# EAGLE board Down Linker ver2.0.0 (EAGLE 9.6.2)
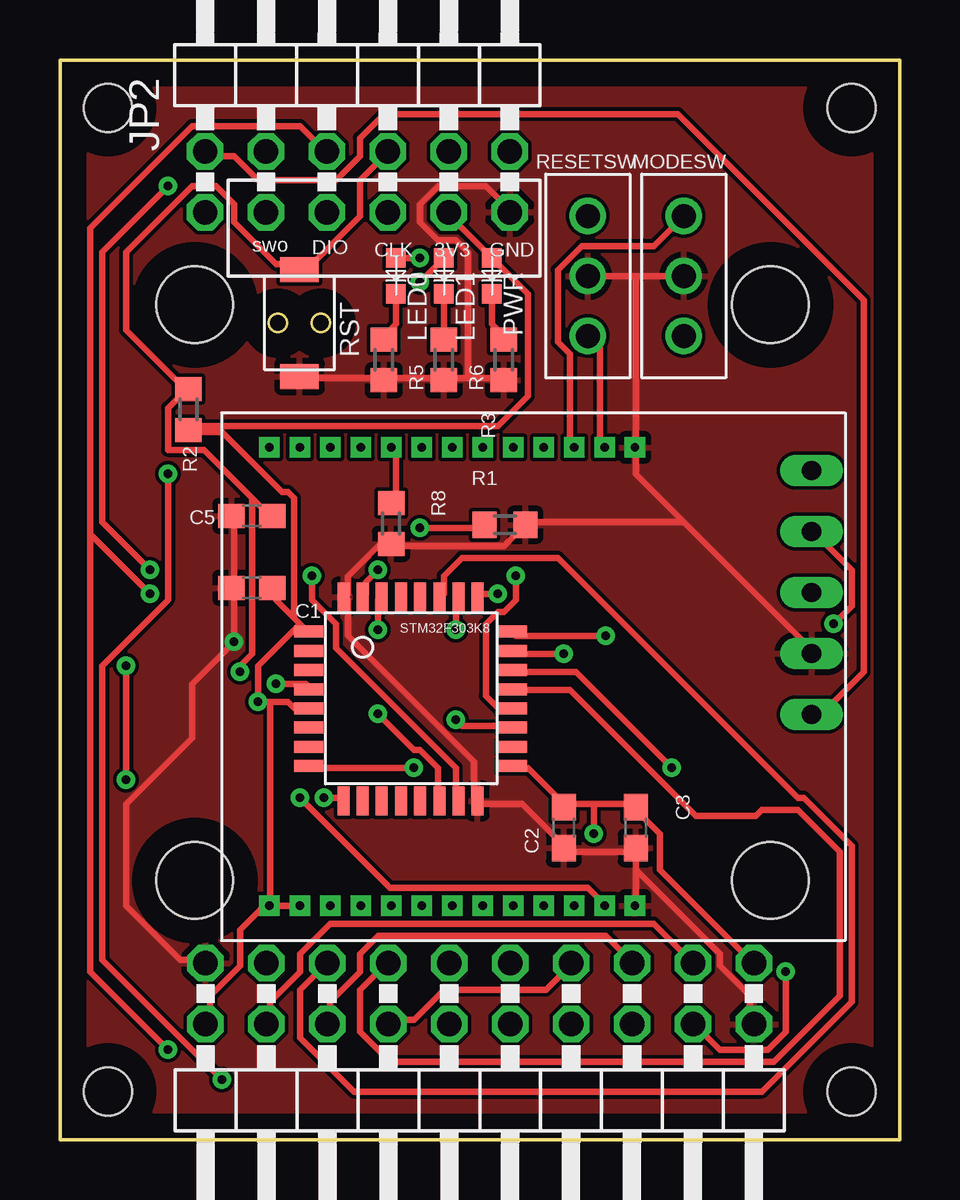
[diagram p0: board, top side]
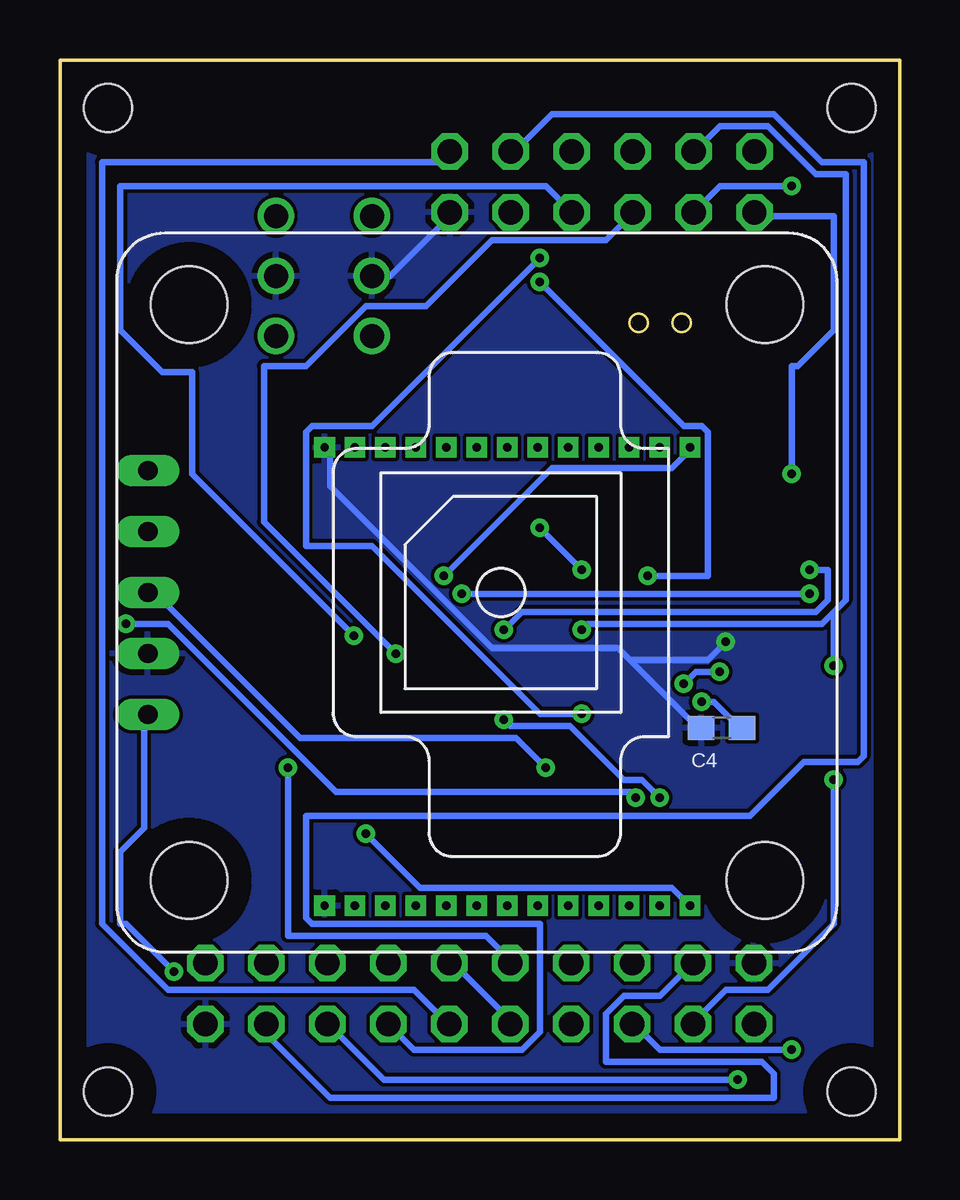
[diagram p1: board, bottom side, seen from below]

Size 35 x 45 mm. Coordinates in mm from the lower left corner, seen from the top.
Outline: 0,0 0,45 35,45 35,0 0,0
Copper layers (1*16): Top 0.035mm / dielectric 1.5mm / Bottom 0.035mm
Design rules "default": minimum track width 6mil, minimum drill 0.35mm, track to track 6mil, track to pad 6mil, pad to pad 6mil, via to via 6mil, smd to smd 6mil, copper to edge 40mil, drill to drill 6mil, minimum pad ring 10mil, minimum via ring 8mil, stop-mask expansion 4mil, vias tented up to drill 0mil, thermal gap 10mil
Net classes: 0 default: width 0.279 mm
Holes 2 mm at 2,43 2,2 33,2 33,43

## Footprints (pad centres in the part's own frame; a part is rotated, then mirrored left to right if it is on the bottom)
C1608 = smd 1.1 x 1: 1 -0.85,0; 2 0.85,0
2X06/90 = drill 1.016 octagon: 1 -6.35,-6.35; 2 -6.35,-3.81; 3 -3.81,-6.35; 4 -3.81,-3.81; 5 -1.27,-6.35; 6 -1.27,-3.81; 7 1.27,-6.35; 8 1.27,-3.81; 9 3.81,-6.35; 10 3.81,-3.81; 11 6.35,-6.35; 12 6.35,-3.81
2X10/90 = drill 1.016 octagon: 1 -11.43,-6.35; 2 -11.43,-3.81; 3 -8.89,-6.35; 4 -8.89,-3.81; 5 -6.35,-6.35; 6 -6.35,-3.81; 7 -3.81,-6.35; 8 -3.81,-3.81; 9 -1.27,-6.35; 10 -1.27,-3.81; 11 1.27,-6.35; 12 1.27,-3.81; 13 3.81,-6.35; 14 3.81,-3.81; 15 6.35,-6.35; 16 6.35,-3.81; 17 8.89,-6.35; 18 8.89,-3.81; 19 11.43,-6.35; 20 11.43,-3.81
OSXX1608C1A = smd 0.8 x 0.8: AN -0.75,0; CT 0.75,0
SRIDE_SWITCH = drill 1: L -2.5,0; LR 0,0; R 2.5,0
R0603 = smd 1 x 1.1: 1 -0.85,0; 2 0.85,0
TVAF06-A020B-R = smd 1.6 x 1.05: P$1 0,2.225; P$2 0,-2.225
STM32F303K8 = smd 0.5 x 1.2: BOOT 1.6,8.5; PA3/UART2_RX 0.8,0; PA4/SPI1_NSS 1.6,0; PA5/SPI1_SCK 2.4,0; PA6/SPI1_MISO 3.2,0; PA7/SPI1_MOSI 4,0; PA15/I2C1_SCL 6.4,8.5; PB0 4.8,0; PB1 5.6,0; PB3/SWO 5.6,8.5; PB4 4.8,8.5; PB5 4,8.5; PB6 3.2,8.5; PB7/I2C1_SDA 2.4,8.5; VSS 0.8,8.5; VSS2 6.4,0 | smd 1.2 x 0.5: NRST -0.65,4.65; PA0 -0.65,3.05; PA1 -0.65,2.25; PA2/UART2_TX -0.65,1.45; PA8 7.85,2.25; PA9/UART1_TX 7.85,3.05; PA10/UART1_RX 7.85,3.85; PA11/CAN_RX 7.85,4.65; PA12/CAN_TX 7.85,5.45; PA13/SWDIO 7.85,6.25; PA14/SWCLK 7.85,7.05; PF0 -0.65,6.25; PF1 -0.65,5.45; VDD -0.65,7.05; VDD2 7.85,1.45; VDDA -0.65,3.85
AE-GYSFDMAXB = drill 0.8 long: P1 13.716,5.08; P2 13.716,2.54; P3 13.716,0; P4 13.716,-2.54; P5 13.716,-5.08 | hole 3.2: -12,12; 12,12; 12,-12; -12,-12
RM-92A = drill 0.35 square: - 0,11.43; BOOT0 0,5.08; GND1 0,15.24; GND2 19.1,15.24; PA8 0,6.35; PA9 0,0; PA10 19.1,13.97; PA11 0,8.89; PA12 0,7.62; PA13 19.1,11.43; PA14 19.1,12.7; PA15 19.1,10.16; PB2 0,3.81; PB3 19.1,8.89; PB4 19.1,7.62; PB7 0,10.16; PB10 0,2.54; PB11 0,1.27; PB12 19.1,2.54; PB13 19.1,3.81; PB14 19.1,5.08; PB15 19.1,6.35; PC13 0,12.7; RESET_N 0,13.97; VCC 19.1,1.27; VDDRF 19.1,0

## Placement (x,y rotation side)
C1  100nF  [C1608]  8,23 180 top
C2  100nF  [C1608]  21,13 270 top
C3  4.7uF  [C1608]  24,13 270 top
C4  10nF  [C1608]  7.41,17.17 180 bottom
C5  0.1uF  [C1608]  8,26 180 top
JP2  [2X06/90]  12.4,45 0 top
JP3  [2X10/90]  17.5,1 180 top
LED0  [OSXX1608C1A]  14,36 270 top
LED1  [OSXX1608C1A]  16,36 270 top
MODESW  SRIDE_SWITCH  [SRIDE_SWITCH]  26,36 90 top
PWR  [OSXX1608C1A]  18,36 270 top
R1  10k  [R0603]  18.56,25.62 0 top
R2  10k or DNF  [R0603]  5.36,30.43 270 top
R3  100  [R0603]  18.5,32.5 90 top
R5  100  [R0603]  13.5,32.5 90 top
R6  100  [R0603]  16,32.5 90 top
R8  10k  [R0603]  13.81,25.68 90 top
RESETSW  SRIDE_SWITCH  [SRIDE_SWITCH]  22,36 270 top
RST  [TVAF06-A020B-R]  9.98,34.03 0 top
U$1  STM32F303K8  [STM32F303K8]  11.02,14.12 0 top
U$2  AE-GYSFDMAXB  [AE-GYSFDMAXB]  17.62,22.8 180 bottom
U$3  RM-92A  [RM-92A]  8.73,28.85 270 top

## Library data of the parts
C1-C5 = rcl; SPICEPREFIX: C
JP2 JP3 = pinhead
LED0 LED1 PWR = Chip LED
MODESW RESETSW = Sride Switch
R1-R3 R5 R6 R8 = rcl; SPICEPREFIX: R
RST = Tact switch
U$1 = STM32F303K8
U$2 = AE-GYSFDMAXB
U$3 = RM-92A

## Nets
+3V3: C1.1 C2.1 C3.1 C4.1 JP2.9 JP3.1 JP3.20 PWR.AN R2.2 U$1.VDD U$1.VDD2 U$1.VDDA U$3.VCC U$3.VDDRF
+5V: JP2.2 JP3.4 JP3.17 U$2.P1
BIT1: JP3.11 U$1.PA12/CAN_TX
BIT2: JP3.13 U$1.PA11/CAN_RX
BOOT0: R1.1 U$1.BOOT
FP_CHECKER: JP3.15 U$1.PB4
FPRAW: JP2.12 JP3.10
GND: C1.2 C2.2 C3.2 C4.2 C5.2 JP2.11 JP3.2 JP3.19 MODESW.LR R1.2 R3.1 R5.1 R6.1 R8.1 RESETSW.LR RST.P$2 U$1.VSS U$1.VSS2 U$2.P2 U$3.GND1 U$3.GND2
GPSRX: U$1.PA2/UART2_TX U$2.P3
GPSTX: U$1.PA3/UART2_RX U$2.P4
LED0: LED0.AN U$1.PB0
LED1: LED1.AN U$1.PB1
LOGRX: JP3.7 JP3.14
LOGTX: JP3.9 JP3.12
N$1: PWR.CT R3.2
N$2: LED0.CT R5.2
N$4: LED1.CT R6.2
N$5: MODESW.R U$3.PC13
N$6: RESETSW.R U$3.RESET_N
N$10: R8.2 U$3.BOOT0
NRST: C5.1 JP2.8 R2.1 RST.P$1 U$1.NRST
OSC_IN: U$1.PF0
OSC_OUT: U$1.PF1
PWM: JP2.1 JP3.6
RFRX: U$1.PA9/UART1_TX U$3.PA10
RFTX: U$1.PA10/UART1_RX U$3.PA9
SCL: JP2.6 JP3.5 JP3.16 U$1.PA15/I2C1_SCL
SDA: JP2.4 JP3.3 JP3.18 U$1.PB7/I2C1_SDA
SW: JP2.10 JP3.8
SWCLK: JP2.7 U$1.PA14/SWCLK
SWDIO: JP2.5 U$1.PA13/SWDIO
SWO: JP2.3 U$1.PB3/SWO

## Tracks (layer width: path | path; a pad name or v marks a point on that pad's centre or on a via)
+3V3  (via drill 0.35)
  Top 0.279: 22.25,14 24,14 C3.1 24,13.75 25,12.75 25,11.25 28.75,7.5 JP3.1 | 22.25,14 21,14 | 21,14 19.5,15.5 19,15.5 U$1.VDD2 | 21,14 C2.1 | U$3.VCC 8.75,9.75 | 8.75,18.25 9.5,18.25 9.75,18 10.25,18 U$1.VDDA | 8.75,18.25 v8.25,18.25 8.25,19.75 10,21.5 | 8.75,18.25 8.75,9.75 | 8.75,9.75 U$3.VDDRF 8.5,9.75 7.5,8.75 7.5,7.25 6.25,6 6.25,5 JP3.20 | JP2.9 16.25,38.5 PWR.AN 19.5,35.25 19.5,31 18.25,29.75 5.5,29.75 R2.2 5.5,29.5 6.75,29.5 9.25,27 9.5,27 9.75,26.75 9.75,21.75 | 10,21.5 10.25,21.25 U$1.VDD | 10,21.5 9.75,21.75 | 9.75,21.75 9,22.5 9,23 C1.1 | v22.25,12.75 22.25,14
  Bottom 0.279: v8.25,18.25 7.75,18.25 6.75,17.25 C4.1 | v22.25,12.75 20,10.5 9.5,10.5 8.75,9.75 U$3.VDDRF
+5V  (via drill 0.35)
  Top 0.279: v30.25,7 30.25,4.5 29.5,3.75 27.5,3.75 26.5,4.75 JP3.4 | JP2.2 6.25,41 7.25,41 8.25,40 11.5,40 12.5,41 12.5,41.75 13.5,42.75 25.75,42.75 33.5,35 33.5,19.5 31.5,17.5 U$2.P1
  Bottom 0.279: v30.25,7 32.25,9 32.5,9 32.5,12 31.5,13 31.5,17.5 U$2.P1 | JP3.17 8.75,7.25 10,6 11.5,6 12.25,5.25 12.25,3.25 5.75,3.25 5.25,2.75 5.25,1.75 23.75,1.75 26.25,4.25 26.25,4.75 JP3.4
BIT1  (via drill 0.35)
  Top 0.279: v25.5,15.5 21.5,19.5 19,19.5 U$1.PA12/CAN_TX
  Bottom 0.279: v25.5,15.5 25.5,8.5 17.25,8.5 16.25,7.5 JP3.11
BIT2
  Top 0.279: U$1.PA11/CAN_RX 19,18.75 21.25,18.75 26.5,13.5 29,13.5 29.25,13.75 30.75,13.75 32.5,12 32.5,6 29.75,3.25 13.75,3.25 12.5,4.5 12.5,6.25 13.5,7.25 JP3.13
BOOT0  (via drill 0.35)
  Top 0.279: v15,25.5 17.5,25.5 R1.1 | v13.25,23.75 12.75,23.25 12.75,22.75 U$1.BOOT
  Bottom 0.279: v13.25,23.75 v15,25.5
FP_CHECKER
  Top 0.279: U$1.PB4 16,22.75 16,23.5 16.75,24.25 20.75,24.25 30.75,14.25 31,14.25 33,12.25 33,5.75 29.25,2 12.25,2 10,4.25 10,6.25 11,7.25 JP3.15
FPRAW
  Bottom 0.279: JP3.10 19,5 20.25,6.25 30.5,6.25 33.25,9 33.25,40.75 19,40.75 18.75,41 JP2.12
GND  (via drill 0.35)
  Top 0.279: 16,31.75 13.5,31.75 | 16,31.75 17,31.75 | 17,31.75 18.5,31.75 R3.1 | 16,31.75 R6.1 | 13.5,31.75 10,31.75 RST.P$2 | 13.5,31.75 R5.1 | MODESW.LR 24,36 | 24,36 RESETSW.LR | 17,31.75 17,37 16.5,37.5 15.75,37.5 15,38.25 15,39 15.75,39.75 17.75,39.75 18.75,38.75 JP2.11 | 24,12 21,12 C2.2 21,12.25 19.25,14 17.5,14 U$1.VSS2 17.25,14.25 17.25,15.75 12,21 12,22.5 U$1.VSS 12,22.75 12,23.5 13.25,24.75 13.75,24.75 R8.1 14,24.75 18.5,24.75 19.25,25.5 R1.2 19.5,25.75 26,25.75 | 24,12 24,11.25 | 24,11.25 24,9.75 U$3.GND2 | 24,12 C3.2 | 24,11.25 27.5,7.75 27.5,7.25 28.75,6 28.75,5 JP3.2 | 7.25,23 7.25,26 C5.2 | 7.25,23 v7.25,20.75 5.5,19 5.5,16.75 2.75,14 2.75,9.75 5,7.5 6,7.5 JP3.19 | 7.25,23 C1.2 | 26,25.75 24,27.75 24,28.75 U$3.GND1 24,29 24,36 | 26,25.75 31.25,20.5 U$2.P2
  Bottom 0.279: RESETSW.LR 21.25,36 18.75,38.5 JP2.11 | 11.25,20 11.75,20.5 17,20.5 23.75,27.25 23.75,28.75 U$3.GND1 | 11.25,20 8.5,17.25 C4.2 | v7.25,20.75 8,20 11.25,20
  pour Top: -3,48 38,48 38,-2 -3,-2
  pour Bottom: -5,49 39,49 39,-3 -5,-3
GPSRX  (via drill 0.35)
  Top 0.279: v14.75,15.5 10.5,15.5 U$1.PA2/UART2_TX
  Bottom 0.279: v14.75,15.5 16,16.75 25,16.75 31,22.75 31.25,22.75 U$2.P3
GPSTX  (via drill 0.35)
  Top 0.279: v11,14.25 11.75,14.25 U$1.PA3/UART2_RX | v32.25,21.5 33,22.25 33,23.75 31.5,25.25 U$2.P4
  Bottom 0.279: v11,14.25 11.25,14.5 23.5,14.5 30.5,21.5 v32.25,21.5
LED0  (via drill 0.35)
  Top 0.279: v15,36.75 LED0.AN | v13.25,17.75 14.75,16.25 15,16.25 15.75,15.5 15.75,14.25 U$1.PB0
  Bottom 0.279: v15,36.75 22,29.75 24.5,29.75 24.75,29.5 24.75,24.75 22,24.75 15,17.75 v13.25,17.75
LED1  (via drill 0.35)
  Top 0.279: v15,35.75 LED1.AN | v10.5,23.5 10.5,22.5 11.5,21.5 11.5,20.5 16.5,15.5 16.5,14.25 U$1.PB1
  Bottom 0.279: v15,35.75 9,29.75 8.25,29.75 8,29.5 8,23.5 v10.5,23.5
LOGRX
  Top 0.279: JP3.14 13.75,5 14.75,5 16,6.25 20.25,6.25 21.25,7.25 JP3.7
LOGTX
  Bottom 0.279: JP3.12 16.25,5 18.5,7.25 18.75,7.25 JP3.9
N$1
  Top 0.279: PWR.CT 18,34 18.5,33.5 R3.2
N$2
  Top 0.279: LED0.CT 14,34 13.5,33.5 R5.2
N$4
  Top 0.279: R6.2 LED1.CT
N$5
  Top 0.279: MODESW.R 24.75,37.25 21.75,37.25 20.75,36.25 20.75,33.25 21.25,32.75 21.25,29 U$3.PC13
N$6
  Top 0.279: RESETSW.R 22.5,33 22.5,29 U$3.RESET_N
N$10
  Top 0.279: R8.2 14,26.75 14,28.75 U$3.BOOT0
NRST  (via drill 0.35)
  Top 0.279: JP2.8 13.5,41 12.5,40 12.5,38.5 10.5,36.5 10,36.5 RST.P$1 9.75,36.5 9,36.5 7.25,38.25 7.25,39 6.5,39.75 5.5,39.75 2.75,37 2.75,33.75 5.25,31.25 | 8,26.75 6,28.75 4.5,28.75 4.5,30.5 5.25,31.25 | 8,26.75 8.75,26 C5.1 | v9,19 10.25,19 U$1.NRST | v7.5,19.5 7.5,19.75 8,20.25 8,26.75 | 5.25,31.25 R2.1
  Bottom 0.279: v9,19 8.5,19.5 v7.5,19.5
PWM  (via drill 0.35)
  Top 0.279: v6.75,2.5 1.75,7.5 1.75,19.75 4.5,22.5 v4.5,27.75
  Bottom 0.279: v6.75,2.5 21.5,2.5 23.75,4.75 JP3.6 | v4.5,27.75 4.5,32.25 4.25,32.25 2.75,33.75 2.75,38.5 6,38.5 JP2.1
RFRX  (via drill 0.35)
  Top 0.279: v16.5,17.5 16.75,17.25 18.75,17.25 U$1.PA9/UART1_TX | v10,14.25 13.75,10.5 22,10.5 22.75,9.75 U$3.PA10
  Bottom 0.279: v16.5,17.5 16.25,17.25 13.75,17.25 11.5,15 10.75,15 v10,14.25
RFTX  (via drill 0.35)
  Top 0.279: v19,23.5 19,22.5 18.5,22 18.25,22 17.75,21.5 17.75,18.5 18.25,18 18.75,18 U$1.PA10/UART1_RX
  Bottom 0.279: v19,23.5 14.5,28 9.5,28 8.75,28.75 U$3.PA9
SCL  (via drill 0.35)
  Top 0.279: JP3.16 11.25,5 11.25,5.75 12.5,7 12.5,7.75 13.25,8.5 22.75,8.5 23.75,7.5 JP3.5 | v18.25,22.75 17.5,22.75 U$1.PA15/I2C1_SCL | 1.25,25.25 v3.75,22.75 | 1.25,25.25 1.25,38 5.5,42.25 10,42.25 11,41.25 JP2.6 | v4.5,3.75 1.25,7 1.25,25.25
  Bottom 0.279: v3.75,22.75 v18.25,22.75 | v4.5,3.75 10,3.75 11,4.75 JP3.16
SDA  (via drill 0.35)
  Top 0.279: JP3.18 8.75,5 8.75,5.75 10,7 10,7.75 11.25,9 24.75,9 26.25,7.5 JP3.3 | v13.25,21.25 13.25,22.5 U$1.PB7/I2C1_SDA | v2.75,19.75 v2.75,15
  Bottom 0.279: v13.25,21.25 13,21.5 3.25,21.5 2.75,22 | 2.75,22 2.25,22.5 2.25,40.25 3.5,40.25 5.5,42.25 7.5,42.25 8.5,41.25 JP2.4 | v2.75,15 2.75,9 5.5,6.25 7.25,6.25 8.5,5 JP3.18 | 2.75,22 v2.75,19.75
SW
  Bottom 0.279: JP3.8 20.25,3.75 15.75,3.75 15,4.5 15,9 24.5,9 24.75,9.25 24.75,13.5 6.25,13.5 4,15.75 1.75,15.75 1.5,16 1.5,40.75 3.25,40.75 5.25,42.75 14.5,42.75 16,41.25 JP2.10
SWCLK  (via drill 0.35)
  Top 0.279: v22.75,21 19,21 U$1.PA14/SWCLK
  Bottom 0.279: v22.75,21 29.5,27.75 29.5,32 30.75,32 32.5,33.75 32.5,39.75 14.75,39.75 13.75,38.75 JP2.7
SWDIO  (via drill 0.35)
  Top 0.279: v21,20.25 19,20.25 U$1.PA13/SWDIO
  Bottom 0.279: v21,20.25 26.5,25.75 26.5,32.25 24.75,32.25 22.25,34.75 19.75,34.75 17,37.5 12.25,37.5 11.25,38.5 JP2.5
SWO  (via drill 0.35)
  Top 0.279: v16.5,21.25 16.5,22.5 U$1.PB3/SWO | v3.75,23.75 1.75,25.75 1.75,37 v4.5,39.75
  Bottom 0.279: v16.5,21.25 15.75,22 3.5,22 3,22.5 3,23.75 v3.75,23.75 | v4.5,39.75 7.5,39.75 8.5,38.75 JP2.3

## Text on the board
tPlace: swo | DIO | CLK | 3V3 | GND